# Altium PCB EDVDU_v2.PcbDoc
Units mil, origin at the board's own origin, x right, y up, seen from the top; angles counter-clockwise.
Board outline 6000 x 4000 mil, 2 copper layers (Top Layer, Bottom Layer); 86 components, 95 nets, 316 pads, 0 vias.
Unrouted connection lines stored in the file: 134.
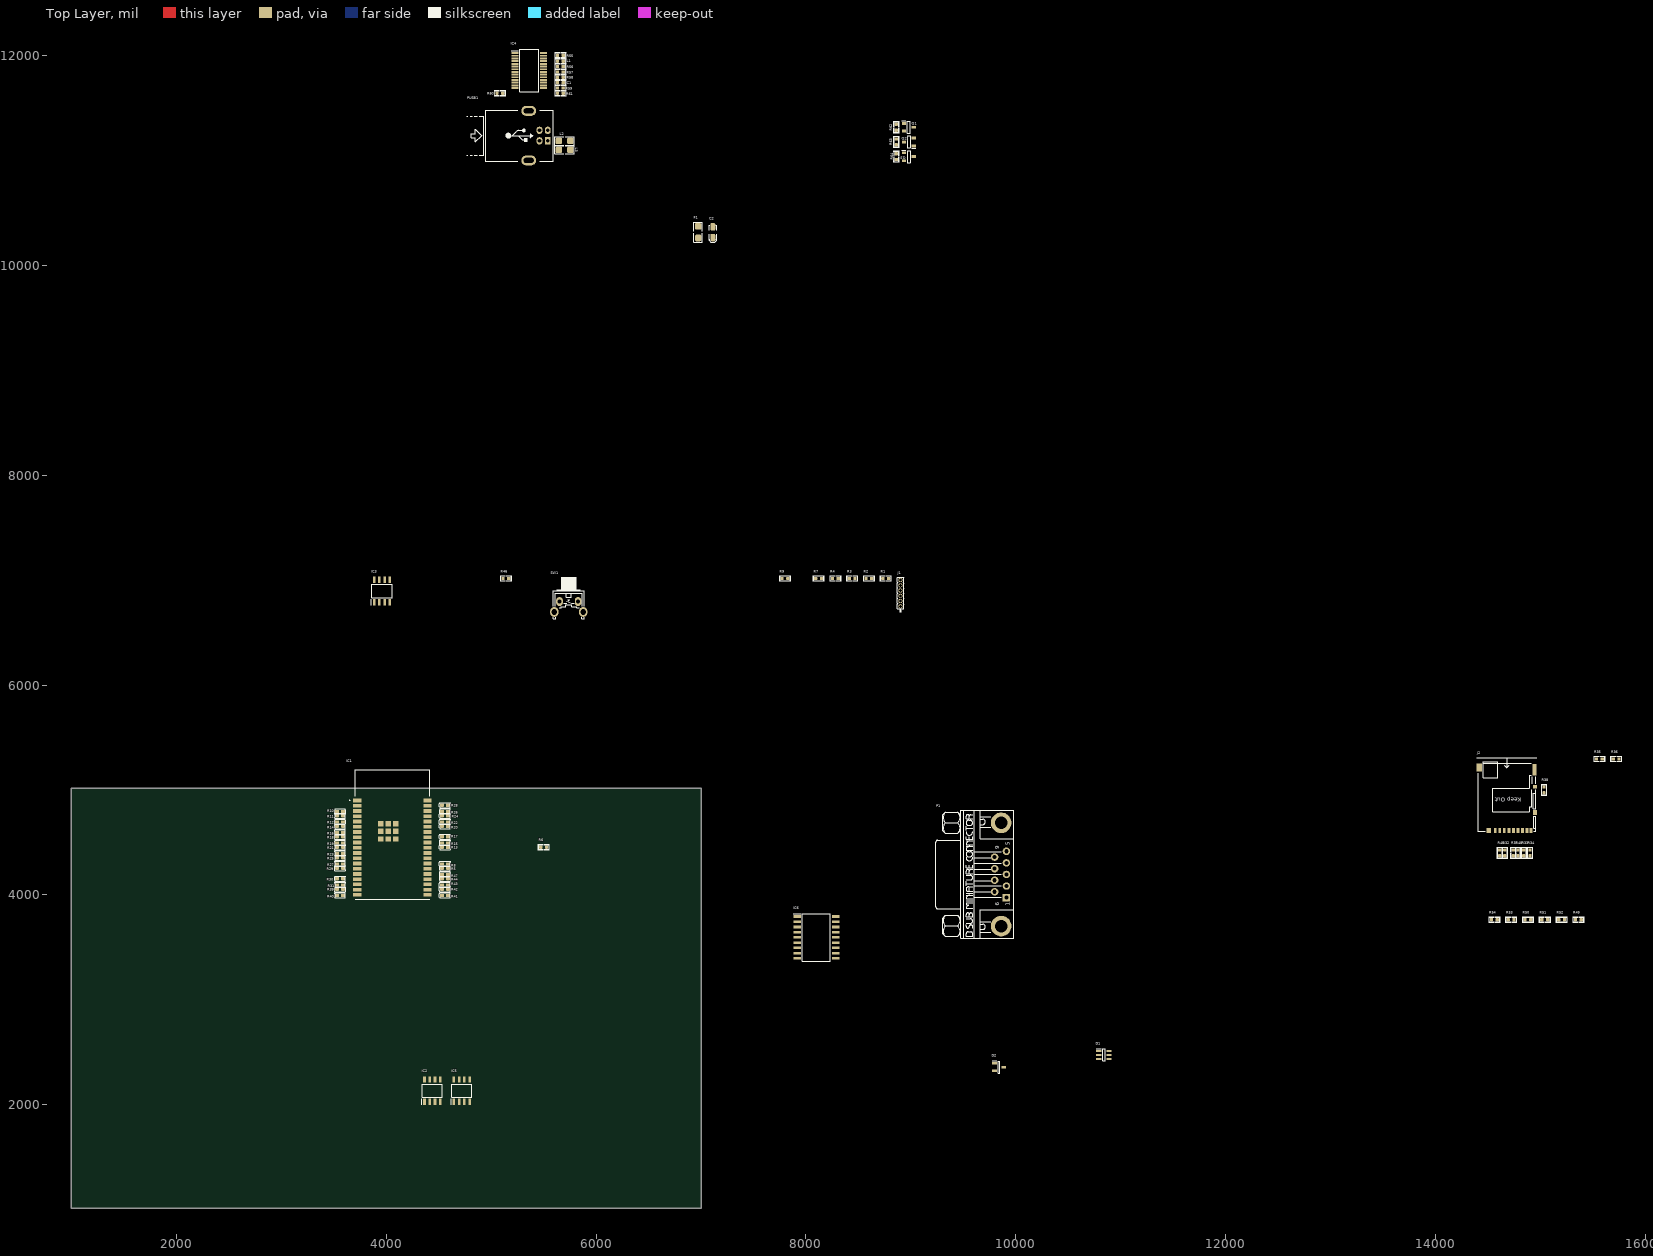
[diagram p0: Top Layer view]
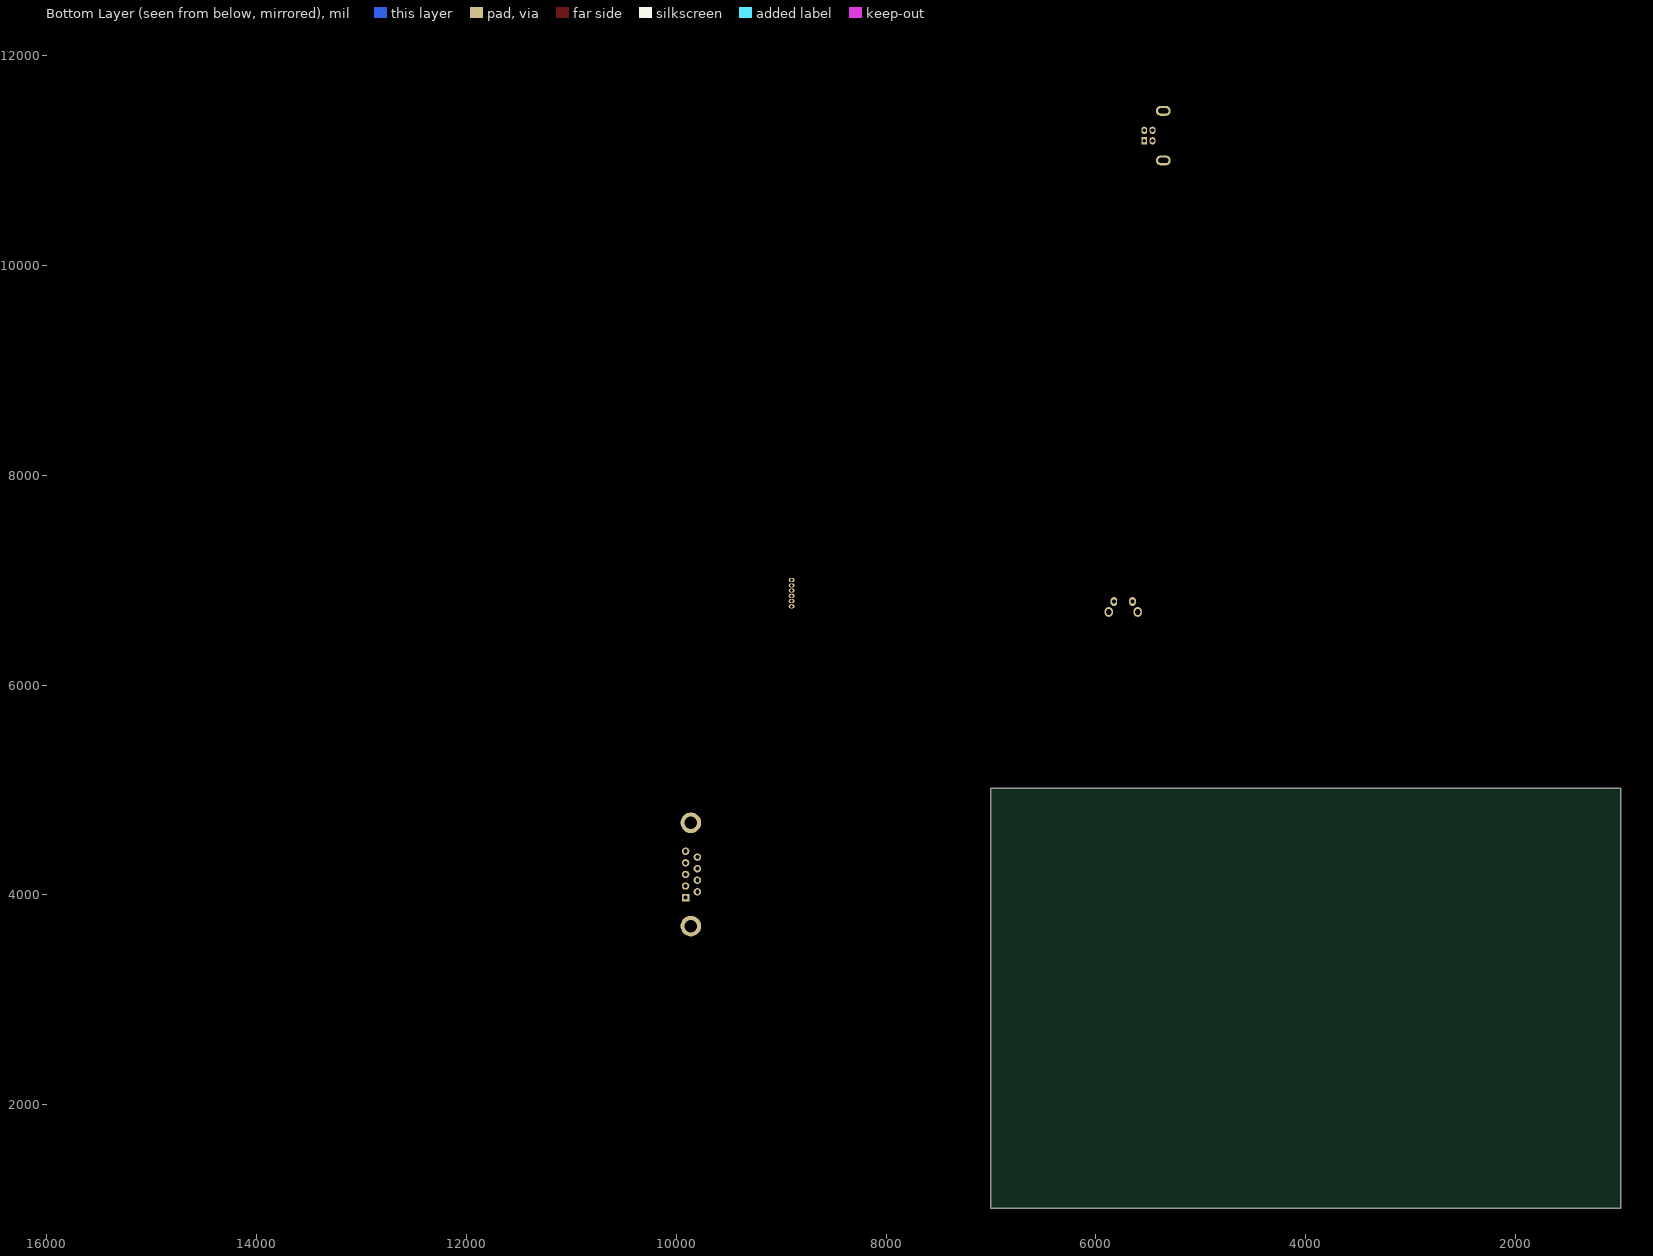
[diagram p1: Bottom Layer view, seen from below]

## Layer stack, top to bottom
Top Solder: solder mask 0.4, Solder Resist, Dk 3.5
Top Layer: signal copper 1.4
Dielectric 1: dielectric 12.6, FR-4, Dk 4.8
Bottom Layer: signal copper 1.4
Bottom Solder: solder mask 0.4, Solder Resist, Dk 3.5

## Board outline
1000,1015.16 7000,1015.16 7000,5015.16 1000,5015.16

## Design rules (kind name [scope] priority, off if disabled: settings)
Clearance [All] p1: gap=10 ignorepadtopadclearanceinfootprint=FALSE except(0: Arc-Hole Track-Hole SMDPad-Hole THPad-Hole Via-Hole Fill-Hole Poly-Hole Region-Hole Text-Hole)
DiffPairsRouting [All] p1: maxlimit=10 minlimit=10 mostfreqgap=10 toplayer_minwidth=15 toplayer_maxwidth=15 toplayer_prefwidth=15 bottomlayer_minwidth=15 bottomlayer_maxwidth=15 bottomlayer_prefwidth=15 maxuncoupledlength=500
PolygonConnect [All] p1: connectstyle=Relief reliefconductorwidth=10 reliefentries=4 polygonreliefangle="90 Angle" airgapwidth=10
RoomDefinition EDVDU_v2 [InComponentClass('EDVDU_v2')] p1: confinementstyle=ConfineOut formatcopy=TRUE lockcomponents=FALSE outline 7045,1075.16 7930,1075.16 7930,2465.16 7045,2465.16
RoutingVias [All] p1: holewidth=28 width=50 viastyle="Through Hole" minholewidth=28 minwidth=50 maxholewidth=28 maxwidth=50
SolderMaskExpansion [All] p1: expansion=4
Width [All] p1: maxlimit=10 minlimit=10 preferedwidth=10
29 further rules are at their usual default settings.

## Classes and differential pairs
differential pair FTDI_USB: +FTDI_USB_P -FTDI_USB_N

## Components (designator, comment, footprint, x,y, rotation, side; value= is the part's Value field where it differs from the comment)
C1 "100nF" C0603 5660.31,11740 r0 top
C2 "-uF" C_TN_3216 7112.44,10315.16 r90 top
D1 "PRTR5V0U4D,125" SOT95P275X110-6N 10840,2475.16 r0 top
D2 "BAT54A" SOT95P240X110-3N 9840,2360 r0 top
F1 "FUSE3A_1206" F1206 6972.44,10315.16 r90 top
IC1 "ESP32-WROVER-B_M213DH3264PH3Q0_" ESP32WROVERBM213DH3264PH3Q0 4060,4575.16 r0 top
IC2 "TJA1020T_CM,118" SOIC127P600X175-8N 4440,2135.16 r90 top
IC3 "TJA1050T_CM,118" SOIC127P600X175-8N 3960,6895.16 r90 top
IC4 "FT232RL" SOP65P778X200-28N 5363.15,11855.16 r0 top
IC5 "TJA1050T_CM,118" SOIC127P600X175-8N 4720,2135.16 r90 top
IC6 "MCP2515-I_SO" SOIC127P1030X265-18N 8100,3595.16 r0 top
J1 "JTAG" HDRMINI_M_1X6 8900,6875.16 r90 top value=HDRMINI_6
J2 "SDMICRO" SDMICRO_DM3AT 14680,4915.16 r0 top
L1 "10uH" L0603 5660.31,11944.72 r0 top
L2 "10uH" L1206 5700,11185.16 r0 top
L3 "10uH" L1206 5700,11100 r180 top
P1 "DSUB_9RF" DSUB_9RF 9860,4195.16 r90 top
PUSB1 "CONN_USB_B" USB_B_RA_THD 5500,11235.16 r90 top
Q1 "MMBT3904" SOT95P240X120-3N 8980,11315.16 r0 top
Q2 "MMBT3904" SOT95P240X120-3N 8980,11175.16 r180 top
Q3 "MMBT3904" SOT95P240X120-3N 8980,11035.16 r0 top
R1 "10K" R0603#1 8760,7015.16 r0 top
R2 "10K" R0603#1 8600,7015.16 r0 top
R3 "10K" R0603#1 8440,7015.16 r0 top
R4 "10K" R0603#1 8280,7015.16 r0 top
R5 "0R" R0603#2 4560,4255.16 r0 top
R6 "10K" R0603#1 5500,4455.16 r0 top
R7 "10K" R0603#1 8120,7015.16 r0 top
R8 "0R" R0603#2 4560,4295.16 r0 top
R9 "10K" R0603#1 7800,7015.16 r0 top
R10 "0R" R0603#2 3560,4795.16 r0 top
R11 "0R" R0603#2 3560,4755.16 r0 top
R12 "0R" R0603#2 3560,4695.16 r0 top
R13 "0R" R0603#2 4560,4455.16 r0 top
R14 "0R" R0603#2 3560,4655.16 r0 top
R15 "0R" R0603#2 4560,4495.16 r0 top
R16 "0R" R0603#2 3560,4595.16 r0 top
R17 "0R" R0603#2 4560,4555.16 r0 top
R18 "0R" R0603#2 3560,4555.16 r0 top
R19 "0R" R0603#2 3560,4495.16 r0 top
R20 "0R" R0603#2 4560,4655.16 r0 top
R21 "0R" R0603#2 3560,4455.16 r0 top
R22 "0R" R0603#2 4560,4695.16 r0 top
R23 "0R" R0603#2 3560,4395.16 r0 top
R24 "0R" R0603#2 4560,4755.16 r0 top
R25 "0R" R0603#2 3560,4355.16 r0 top
R26 "0R" R0603#2 4560,4795.16 r0 top
R27 "0R" R0603#2 3560,4295.16 r0 top
R28 "0R" R0603#2 4560,4855.16 r0 top
R29 "0R" R0603#2 3560,4255.16 r0 top
R30 "0R" R0603#2 3560,4155.16 r0 top
R31 "0R" R0603#2 3560,4095.16 r0 top
R32 "0R" R0603#1 14660,4400 r270 top
R33 "0R" R0603#1 14840,4400 r270 top
R34 "0R" R0603#1 14900,4400 r270 top
R35 "0R" R0603#1 15560,5295.16 r0 top
R36 "0R" R0603#1 15720,5295.16 r0 top
R37 "0R" R0603#1 14741.03,4400.35 r270 top
R38 "0R" R0603#1 15032.44,5000 r270 top
R39 "0R" R0603#2 3560,4055.16 r0 top
R40 "0R" R0603#2 3560,3995.16 r0 top
R41 "0R" R0603#2 4560,3995.16 r180 top
R42 "0R" R0603#2 4560,4055.16 r180 top
R43 "0R" R0603#2 4560,4095.16 r180 top
R44 "0R" R0603#2 4560,4155.16 r180 top
R45 "0R" R0603#1 14611.11,4400 r90 top
R46 "10K" R0603#1 5140,7015.16 r0 top
R47 "0R" R0603#2 4560,4195.16 r180 top
R48 "0R" R0603#1 14784.34,4400 r90 top
R49 "0R" R0603#1 15360,3764.25 r0 top
R50 "0R" R0603#1 14880,3764.25 r0 top
R51 "0R" R0603#1 15040,3764.25 r0 top
R52 "10K" R0603#1 15200,3764.25 r0 top
R53 "0R" R0603#1 14720,3764.25 r0 top
R54 "0R" R0603#1 14560,3764.25 r0 top
R55 "10K" R0603#1 5660.31,12000 r180 top
R56 "0R" R0603#1 5660.31,11893.54 r0 top
R57 "0R" R0603#1 5660.31,11842.36 r0 top
R58 "10K" R0603#1 5660.31,11791.18 r180 top
R59 "0R" R0603#1 5660.31,11688.82 r0 top
R60 "10K" R0603#1 5083.15,11640 r0 top
R61 "0R" R0603#1 5660.31,11640 r0 top
R62 "10K" R0603#1 8860,11315.16 r270 top
R63 "10K" R0603#1 8860,11175.16 r90 top
R64 "10K" R0603#1 8860,11035.16 r90 top
SW1 "PUSHBUTTON" SWPBT_SPST_R_6X6X6 5740,6795.16 r0 top

## Footprints (in the part's own frame and the unit in brackets; to place one, negate y for a bottom-side part, rotate by r counter-clockwise, add the part's x,y. Pads: shape width x height; smd on the part's side, far side on the other; paste and mask are expansions set on the pad)
C0603 [mm] "CHIP Capacitor, 1.6X0.8mm, 0603 OPTIMIZED"
  rrect50% 0.8x0.8 smd paste-5 mask+0.075: 1(-0.7,0) 2(0.7,0)
  Top Layer pour cut-out: -0.5,0.4 0.5,0.4 0.5,-0.4 -0.5,-0.4
  silkscreen extent -1.4,-0.7 1.4,0.7, body extent -0.8,-0.4 0.8,0.4, height 0.9
C_TN_3216 [mm] "CAPACITOR, TAN A, 1206P, 3.2x1.6mm"
  rrect50% 1.8x1.2 smd mask+0.075: 1(-1.3,0) 2(1.3,0)
  Top Layer pour cut-out: -0.762,0.9 0.762,0.9 0.762,-0.9 -0.762,-0.9
  silkscreen extent -2.4,-0.9 1.7,0.9, body extent -1.7,-0.9 1.7,0.9, height 1.7
DSUB_9RF [mm] "CONN, DSUB MINIATURE, 9PIN, R/A, FEMALE"
  rect 1.8x1.8 hole 1 mask+0.1: 1(-5.6,-1.27)
  round 1.8 hole 1 mask+0.1: 2(-2.8,-1.27) 3(0,-1.27) 4(2.8,-1.27) 5(5.6,-1.27) 6(-4.2,1.57) 7(-1.4,1.57) 8(1.4,1.57) 9(4.2,1.57)
  round 5 hole 3: MH1(-12.5,0) MH2(12.5,0)
  silkscreen extent -15.5,-3 15.5,15.8, body extent -15.4,-2.9 15.4,15.6, height 12.8
ESP32WROVERBM213DH3264PH3Q0 [mm]
  rect 2x0.9 smd: 1(-8.5,8.26) 2(-8.5,6.99) 3(-8.5,5.72) 4(-8.5,4.45) 5(-8.5,3.18) 6(-8.5,1.91) 7(-8.5,0.64) 8(-8.5,-0.63) 9(-8.5,-1.9) 10(-8.5,-3.17) 11(-8.5,-4.44) 12(-8.5,-5.71) 13(-8.5,-6.98) 14(-8.5,-8.25) 15(-8.5,-9.52) 16(-8.5,-10.79) 17(-8.5,-12.06) 18(-8.5,-13.33) 19(-8.5,-14.6) 20(8.5,-14.6) 21(8.5,-13.33) 22(8.5,-12.06) 23(8.5,-10.79) 24(8.5,-9.52) 25(8.5,-8.25) 26(8.5,-6.98) 27(8.5,-5.71) 28(8.5,-4.44) 29(8.5,-3.17) 30(8.5,-1.9) 31(8.5,-0.63) 32(8.5,0.64) 33(8.5,1.91) 34(8.5,3.18) 35(8.5,4.45) 36(8.5,5.72) 37(8.5,6.99) 38(8.5,8.26)
  rect 1.33x1.33 smd: 39(-2.835,2.595) 40(-2.835,0.76) 41(-2.835,-1.075) 42(-1,-1.075) 43(0.835,-1.075) 44(0.835,0.76) 45(0.835,2.595) 46(-1,2.595) 47(-1,0.76)
  silkscreen extent -10.4,-15.7 9,15.7, body extent -9,-15.7 9,15.7, height 3.5
F1206 [mm]
  rrect50% 1.6x1.6 smd paste-2 mask+0.075: 1(-1.4,0) 2(1.4,0)
  Top Layer pour cut-out: -0.8,1 -0.8,-1 0.8,-1 0.8,1
  silkscreen extent -2.4,-1 2.4,1, body extent -1.6,-0.8 1.6,0.8, height 1
HDRMINI_M_1X6 [mm] "mini header (50mil pitch)"
  round 1 / inner round 1 / far side oval 1x1.4 hole 0.7 mask+0.05: 1(-3.175,0) 2(-1.905,0) 3(-0.635,0) 4(0.635,0) 5(1.905,0) 6(3.175,0)
  silkscreen extent -4.52,-0.8 3.81,0.8, body extent -3.81,-0.64 3.81,0.64, height 7.3
L0603 [mm] "INDUCTOR, FERRITE BEAD, 0603, 1.6X0.8mm"
  rrect50% 0.8x0.8 smd paste-5 mask+0.075: 1(-0.7,0) 2(0.7,0)
  silkscreen extent -1.4,-0.7 1.4,0.7, body extent -0.8,-0.4 0.8,0.4, height 0.95
L1206 [mm] "INDUCTOR, FERRITE BEAD, 1206, 3.2X1.6mm"
  rrect50% 1.6x1.6 smd paste-5 mask+0.075: 1(-1.4,0) 2(1.4,0)
  Top Layer pour cut-out: -0.8,1 -0.8,-1 0.8,-1 0.8,1
  silkscreen extent -2.4,-1 2.4,1, body extent -1.6,-0.8 1.6,0.8, height 1.1
R0603#1 [mm] "CHIP Resistor 1/10 WATT, 1.6x0.8mm, 0603, OPTIMIZED"
  rrect50% 0.8x0.8 smd paste-5 mask+0.075: 1(-0.7,0) 2(0.7,0)
  Top Layer pour cut-out: -0.5,0.4 0.5,0.4 0.5,-0.4 -0.5,-0.4
  silkscreen extent -1.4,-0.7 1.4,0.7, body extent -0.85,-0.4 0.85,0.4, height 0.56
R0603#2 [mm]
  rrect50% 1x0.8 smd mask+0.05: 1(-0.7,0) 2(0.7,0)
  silkscreen extent -1.32,-0.6 1.32,0.6, body extent -0.85,-0.4 0.85,0.4, height 0.56
SDMICRO_DM3AT [mm]
  rect 0.7x1.2 smd: 1(-2.85,-7.6) 2(-1.75,-7.6) 3(-0.65,-7.6) 4(0.45,-7.6) 5(1.55,-7.6) 6(2.65,-7.6) 7(3.75,-7.6)
  rect 0.7x1.2 smd mask+0.07: 8(4.85,-7.6) 9(5.8,-7.6)
  rect 1x1.2 smd: 10(6.75,-3.25) 14(-4.4,-7.6)
  rect 1x0.8 smd: 11(6.75,2.95)
  rect 1x2.8 smd: 12(6.7,7.1)
  rect 1.3x1.9 smd: 13(-6.7,7.6)
  silkscreen extent -7.29,-7.78 7.18,9.94, body extent -7,-7.65 6.85,8.5, height 1.68
SOIC127P600X175-8N [mm]
  rect 1.525x0.65 smd: 1(-2.712,1.905) 2(-2.712,0.635) 3(-2.712,-0.635) 4(-2.712,-1.905) 5(2.712,-1.905) 6(2.712,-0.635) 7(2.712,0.635) 8(2.712,1.905)
  silkscreen extent -3.47,-2.45 1.6,2.58, body extent -3,-2.45 3,2.45, height 1.75
SOIC127P1030X265-18N [mm]
  rect 1.85x0.65 smd: 1(-4.675,5.08) 2(-4.675,3.81) 3(-4.675,2.54) 4(-4.675,1.27) 5(-4.675,0) 6(-4.675,-1.27) 7(-4.675,-2.54) 8(-4.675,-3.81) 9(-4.675,-5.08) 10(4.675,-5.08) 11(4.675,-3.81) 12(4.675,-2.54) 13(4.675,-1.27) 14(4.675,0) 15(4.675,1.27) 16(4.675,2.54) 17(4.675,3.81) 18(4.675,5.08)
  silkscreen extent -5.6,-5.77 3.4,5.77, body extent -5.15,-5.77 5.15,5.77, height 2.65
SOP65P778X200-28N [mm]
  rect 1.7x0.45 smd: 1(-3.5,4.225) 2(-3.5,3.575) 3(-3.5,2.925) 4(-3.5,2.275) 5(-3.5,1.625) 6(-3.5,0.975) 7(-3.5,0.325) 8(-3.5,-0.325) 9(-3.5,-0.975) 10(-3.5,-1.625) 11(-3.5,-2.275) 12(-3.5,-2.925) 13(-3.5,-3.575) 14(-3.5,-4.225) 15(3.5,-4.225) 16(3.5,-3.575) 17(3.5,-2.925) 18(3.5,-2.275) 19(3.5,-1.625) 20(3.5,-0.975) 21(3.5,-0.325) 22(3.5,0.325) 23(3.5,0.975) 24(3.5,1.625) 25(3.5,2.275) 26(3.5,2.925) 27(3.5,3.575) 28(3.5,4.225)
  silkscreen extent -4.35,-5.14 2.3,5.14, body extent -3.89,-5.14 3.89,5.14, height 2
SOT95P240X110-3N [mm]
  rect 1.1x0.6 smd: 1(-1.1,0.95) 2(-1.1,-0.95) 3(1.1,0)
  silkscreen extent -1.65,-1.45 0.2,1.5, body extent -1.2,-1.45 1.2,1.45, height 1.1
SOT95P240X120-3N [mm]
  rect 1x0.7 smd: 1(-1.2,0.95) 2(-1.2,-0.95) 3(1.2,0)
  silkscreen extent -1.7,-1.46 0.35,1.55, body extent -1.2,-1.46 1.2,1.46, height 1.2
SOT95P275X110-6N [mm]
  rect 1.25x0.5 smd: 1(-1.25,0.95) 2(-1.25,0) 3(-1.25,-0.95) 4(1.25,-0.95) 5(1.25,0) 6(1.25,0.95)
  silkscreen extent -1.88,-1.45 0.28,1.55, body extent -1.37,-1.47 1.38,1.48, height 1.01
SWPBT_SPST_R_6X6X6 [mm] "SWITCH, PUSHBUTTON, THD, SPST, 6X6X5.85mm; 1,000,000 cycles ; 0.98N Force, SKHHLUA010"
  oval 1.6x2.2 hole 1 mask+0.1: 1(-2.25,0) 2(2.25,0)
  oval 2x2.4 hole 1.4 mask+0.1: MH1(-3.5,-2.5) MH2(3.5,-2.5)
  silkscreen extent -3.8,-4.1 3.8,5.84, body extent -4.25,-4.04 4.25,5.86, height 7.43
USB_B_RA_THD [mm] "CONN, USB B, Receptacle, RIGHT ANGLE, THD"
  rect 1.8x1.4 hole 0.9: 1(-1.27,-1)
  oval 1.8x1.4 hole 0.9: 2(1.27,-1) 3(1.27,1) 4(-1.27,1)
  oval 2.4x3.6 hole 1.2 slot 2.4 at 90 deg: SH1(-6,3.6) SH2(6,3.6)
  silkscreen extent -6.2,-2.3 6.2,18.57, body extent -7.45,-2.52 7.34,13.98, height 11.1

## Part data
C1: library part CAP_SMD_MLCC, "CAP, SMD, MLCC", ASSEMBLY=ASSEMBLY, DESC="CAP, MLCC, 1nF, 50V, C0G, 10%, 0402", MANF=Murata, MANF_P#=MANF_PART#, PARAM=50V, PARAM2="C0G, 10%", PRICE="100= 1$"
C2: library part CAP_SMD_TAN, "CAP, SMD, TAN,", =http://www.chila.ir, PARAM2=-V
D1: "Diode", Manufacturer_Name=Nexperia, Mouser Part Number=771-PRTR5V0U4D-T/R, Arrow Part Number=PRTR5V0U4D,125, Arrow Price/Stock=https://www.arrow.com/en/products/prtr5v0u4d125/nexperia?region=europe, Datasheet Link=https://assets.nexperia.com/documents/data-sheet/PRTR5V0U4D.pdf, Height=1.1mm, Manufacturer_Part_Number=PRTR5V0U4D,125, Mouser Price/Stock=https://www.mouser.co.uk/ProductDetail/Nexperia/PRTR5V0U4D125?qs=LOCUfHb8d9tF9D2ouM%2FWyA%3D%3D, Ordered By=SpaceOmid
D2: "Schottky Diode", Manufacturer_Name=Rectron, Mouser Part Number=583-BAT54A, Arrow Part Number=BAT54A, Arrow Price/Stock=https://www.arrow.com/en/products/bat54a/rectron?region=nac, Datasheet Link=http://www.rectron.com/data_sheets/bat54a.pdf, Height=1.1mm, Manufacturer_Part_Number=BAT54A, Mouser Price/Stock=https://www.mouser.co.uk/ProductDetail/Rectron/BAT54A?qs=7pEAo90IqNGfs7SPP1chMg%3D%3D, Ordered By=SpaceOmid
F1: library part FUSE_3A_1206_SLOW, "Fuse, 3A, 32VDC, 1206, SMD, Slow Blow", =http://www.chila.ir, MANF=Bourns, MANF_P#=SF-1206SP300-2, Ordered By=SpaceOmid, PARAM="3A; 32VDC; Slow Blow", PARAM2=0.027Ohm, PRICE=0.9$
IC1: "Integrated Circuit", Manufacturer_Name="Espressif Systems", Manufacturer_Part_Number=ESP32-WROVER-B(M213DH3264PH3Q0), Mouser Part Number=356-ESP32-WROVER-B, Datasheet Link=https://www.mouser.com/datasheet/2/891/esp32-wrover-b_datasheet_en-1384674.pdf, Height=3.4mm, Mouser Price/Stock=https://www.mouser.co.uk/ProductDetail/Espressif-Systems/ESP32-WROVER-BM213DH3264PH3Q0?qs=W%2FMpXkg%252BdQ7xuL5m37Yhrg%3D%3D
IC2: "Integrated Circuit", Arrow Part Number=TJA1020T/CM,118, Manufacturer_Name=NXP, Mouser Part Number=771-TJA1020T/CM118, Arrow Price/Stock=https://www.arrow.com/en/products/tja1020tcm118/nxp-semiconductors?region=nac, Datasheet Link=http://www.nxp.com/docs/en/data-sheet/TJA1020.pdf, Height=1.75mm, Manufacturer_Part_Number=TJA1020T/CM,118, Mouser Price/Stock=https://www.mouser.co.uk/ProductDetail/NXP-Semiconductors/TJA1020T-CM118?qs=cbprxTG2Yq%252B9fBsR3gYBWA%3D%3D
IC3 IC5: "Integrated Circuit", Arrow Part Number=TJA1050T/CM,118, Manufacturer_Name=NXP, Mouser Part Number=771-TJA1050T/CM118, Arrow Price/Stock=https://www.arrow.com/en/products/tja1050tcm118/nxp-semiconductors?region=nac, Datasheet Link=http://www.nxp.com/docs/en/data-sheet/TJA1050.pdf, Height=1.75mm, Manufacturer_Part_Number=TJA1050T/CM,118, Mouser Price/Stock=https://www.mouser.co.uk/ProductDetail/NXP-Semiconductors/TJA1050T-CM118?qs=5XOdhvmYM0NFFspw0VP5sA%3D%3D
IC4: "Integrated Circuit", Manufacturer_Name="FTDI Chip", Arrow Part Number=FT232RL, Arrow Price/Stock=https://www.arrow.com/en/products/ft232rl/ftdi-chip?region=nac, Datasheet Link=http://www.ftdichip.com/Support/Documents/DataSheets/ICs/DS_FT232R.pdf, Height=2mm, Manufacturer_Part_Number=FT232RL
IC6: "Integrated Circuit", Arrow Part Number=MCP2515-I/SO, Manufacturer_Name=Microchip, Mouser Part Number=579-MCP2515-I/SO, Arrow Price/Stock=https://www.arrow.com/en/products/mcp2515-iso/microchip-technology?region=nac, Datasheet Link=https://datasheet.datasheetarchive.com/originals/distributors/Datasheets-34/DSA-675138.pdf, Height=2.65mm, Manufacturer_Part_Number=MCP2515-I/SO, Mouser Price/Stock=https://www.mouser.co.uk/ProductDetail/Microchip-Technology/MCP2515-I-SO?qs=KwArPi4cUogGDbGnphOvtQ%3D%3D
J1: library part HDRMINI_M_1X6, "CONN, HEADER, Male, pitch: 1.27mm, 6POS", =http://www.chila.ir
J2: library part SOCKET_SDMICRO_DM3AT, "CONN MICRO SD R/A PUSH-PUSH SMD", MANF=Hirose, MANF_P#=DM3AT-SF-PEJM5, Ordered By=SpaceOmid, PRICE=2.6$
L1 L2 L3: library part IND_SMD, "IND, SMD"
P1: library part CONN_DSUB_9RF, "CONN, DSUB, HD, 9PIN, R/A, FEMALE, THD", =http://www.chila.ir, MANF=-, MANF_P#=-
PUSB1: library part CONN_USB_B_RA_THD, "CONN, USB, B, R/A, THD", =http://www.chila.ir, MANF="TE Connectivity", MANF_P#=292304-1
Q1 Q2 Q3: "Transistor BJT NPN", Manufacturer_Name=onsemi, Mouser Part Number=512-MMBT3904, Arrow Part Number=MMBT3904, Arrow Price/Stock=https://www.arrow.com/en/products/mmbt3904/on-semiconductor, Datasheet Link=https://media.digikey.com/pdf/Data%20Sheets/ON%20Semiconductor%20PDFs/2N3904,MMBT3904,PZT3904.pdf, Height=1.2mm, Manufacturer_Part_Number=MMBT3904, Mouser Price/Stock=https://www.mouser.co.uk/ProductDetail/ON-Semiconductor-Fairchild/MMBT3904?qs=UMEuL5FsraCg3xKjS4uBJQ%3D%3D, Ordered By=SpaceOmid
R1 R2 R3 R4 R5 R6 R7 R8 R9 R10 R11 R12 R13 R14 R15 R16 R17 R18 R19 R20 R21 R22 R23 R24 R25 R26 R27 R28 R29 R30 R31 R32 R33 R34 R35 R36 R37 R38 R39 R40 R41 R42 R43 R44 R45 R46 R47 R48 R49 R50 R51 R52 R53 R54 R55 R56 R57 R58 R59 R60 R61 R62 R63 R64: library part RES_SMD, "RES, SMD", ASSEMBLY=ASSEMBLY, DESC=DESCRIPTION, DIST#=MOUSER, MANF="KOA SPEER", MANF_P#=RK73H1ETTP4701F, PARAM=0.063W, PARAM2=1%, PRICE="100= 0.5$"
SW1: library part SWPBT_SPST_R_6X6X6_SKHHLUA010, "SWITCH, PUSH BUTTON, TACTILE, THD, SPST, 6X6X6mm RIGHT", ASSEMBLY=ASSEMBLY, DESC=DESCRIPTION, MANF=ALPS, MANF_P#=SKHHLUA010, PARAM=PARAM, PRICE=PRICE

## Nets (pads, with @x,y where several pads share a name; then routed paths per layer and width w, separated by ;. In a path a pad name is that pad's centre, name@x,y a point inside that pad or via, vN(x,y) a via of type N, cw(c..) or ccw(c..) an arc to the next point about the centre after c; other vN are vias at no path point)
EARTH: J2.10 J2.12 J2.13 J2.14 PUSB1.SH1 PUSB1.SH2
ESP_EN: J1.6 Q1.3 R7.1 R9.1 R10.1
ESP_RXD0: R22.2
ESP_SD_CLK: R41.1
ESP_SD_CMD: R40.1
ESP_SD_SD0: R42.1
ESP_SD_SD1: R43.1
ESP_SD_SD2: R31.1
ESP_SD_SD3: R39.1
ESP_SENS_VN: R12.1
ESP_SENS_VP: R11.1
ESP_TXD0: R24.2
FTDI_DTR: IC4.2 Q2.2 Q3.2 R62.2
FTDI_OSCI: IC4.27
FTDI_OSCO: IC4.28
FTDI_PWREN: IC4.14 R60.2
FTDI_RESET: IC4.19 R58.2
FTDI_RTS: IC4.3 Q1.2 R63.2 R64.2
FTDI_TEST: IC4.26 R55.2
FTDI_TXDEN: IC4.13
FTDI_USB_N: PUSB1.2 R59.2
FTDI_USB_P: PUSB1.3 R61.2
GND: C1.2 IC1.1 IC1.15 IC1.38 IC1.39 IC1.40 IC1.41 IC1.42 IC1.43 IC1.44 IC1.45 IC1.46 IC1.47 IC4.18 IC4.21 J1.1 J2.9 L1.2 L3.1 R1.2 R46.2 R55.1
GPIO00: Q2.3 R5.2 R6.1
GPIO02: Q3.3 R46.1 R47.1 R48.1
GPIO04: R8.2 R49.1
GPIO05: R13.2
GPIO12: J1.3 R2.1 R29.1 R50.1
GPIO13: J1.2 R1.1 R30.1 R53.1
GPIO14: J1.5 R4.1 R27.1 R54.1
GPIO15: J1.4 R3.1 R44.1 R45.1
GPIO18: R15.2
GPIO19: R17.2
GPIO21: R20.2 R51.2 R52.1
GPIO22: R26.2
GPIO23: IC1.32 R28.2
GPIO25: R21.1
GPIO26: R23.1
GPIO27: R25.1
GPIO32: R18.1
GPIO33: R19.1
GPIO34: R14.1
GPIO35: R16.1
NetC1_1: C1.1 IC4.17
NetIC1_3: IC1.3 R10.2
NetIC1_4: IC1.4 R11.2
NetIC1_5: IC1.5 R12.2
NetIC1_6: IC1.6 R14.2
NetIC1_7: IC1.7 R16.2
NetIC1_8: IC1.8 R18.2
NetIC1_9: IC1.9 R19.2
NetIC1_10: IC1.10 R21.2
NetIC1_11: IC1.11 R23.2
NetIC1_12: IC1.12 R25.2
NetIC1_13: IC1.13 R27.2
NetIC1_14: IC1.14 R29.2
NetIC1_16: IC1.16 R30.2
NetIC1_17: IC1.17 R31.2
NetIC1_18: IC1.18 R39.2
NetIC1_19: IC1.19 R40.2
NetIC1_20: IC1.20 R41.2
NetIC1_21: IC1.21 R42.2
NetIC1_22: IC1.22 R43.2
NetIC1_23: IC1.23 R44.2
NetIC1_24: IC1.24 R47.2
NetIC1_25: IC1.25 R5.1
NetIC1_26: IC1.26 R8.1
NetIC1_29: IC1.29 R13.1
NetIC1_30: IC1.30 R15.1
NetIC1_31: IC1.31 R17.1
NetIC1_33: IC1.33 R20.1
NetIC1_34: IC1.34 R22.1
NetIC1_35: IC1.35 R24.1
NetIC1_36: IC1.36 R26.1
NetIC1_37: IC1.37 R28.1
NetIC4_15: IC4.15 R61.1
NetIC4_16: IC4.16 R59.1
NetIC4_22: IC4.22 R57.1
NetIC4_23: IC4.23 R56.1
NetIC4_25: IC4.25 L1.1
NetJ2_1: J2.1 R35.1 R50.2
NetJ2_2: J2.2 R36.1 R53.2
NetJ2_3: J2.3 R32.1 R45.2
NetJ2_5: J2.5 R37.1 R54.2
NetJ2_7: J2.7 R33.1 R48.2
NetJ2_8: J2.8 R34.1 R49.2
NetJ2_11: J2.11 R38.1 R51.1
NetL2_1: L2.1 PUSB1.1
NetL3_2: L3.2 PUSB1.4
NetQ1_1: Q1.1 R62.1
NetQ2_1: Q2.1 R63.1
NetQ3_1: Q3.1 R64.1
VBUS: L2.2
VCC: IC4.20 R58.1 R60.1
VDD: IC1.2 R2.2 R3.2 R4.2 R6.2 R7.2 R9.2 R32.2 R33.2 R34.2 R35.2 R36.2 R37.2 R38.2 R52.2
pads on no net: C2.1 C2.2 D1.1 D1.2 D1.3 D1.4 D1.5 D1.6 D2.1 D2.2 D2.3 F1.1 F1.2 IC1.27 IC1.28 IC2.1 IC2.2 IC2.3 IC2.4 IC2.5 IC2.6 IC2.7 IC2.8 IC3.1 IC3.2 IC3.3 IC3.4 IC3.5 IC3.6 IC3.7 IC3.8 IC4.1 IC4.4 IC4.5 IC4.6 IC4.7 IC4.8 IC4.9 IC4.10 IC4.11 IC4.12 IC4.24 IC5.1 IC5.2 IC5.3 IC5.4 IC5.5 IC5.6 IC5.7 IC5.8 IC6.1 IC6.2 IC6.3 IC6.4 IC6.5 IC6.6 IC6.7 IC6.8 IC6.9 IC6.10 IC6.11 IC6.12 IC6.13 IC6.14 IC6.15 IC6.16 IC6.17 IC6.18 J2.4 J2.6 P1.1 P1.2 P1.3 P1.4 P1.5 P1.6 P1.7 P1.8 P1.9 P1.MH1 P1.MH2 R56.2 R57.2 SW1.1 SW1.2 SW1.MH1 SW1.MH2

## Text inside footprints (layer, text, board x,y; h text height)
J2: Top Overlay "Keep Out" at 14815,4925.16 h39.37 r180
P1: Top Overlay "6" at 9840,3895.57 h39.37 r90; Top Overlay "1" at 9940,3895.57 h39.37 r90; Top Overlay "5" at 9940,4475.57 h39.37 r90; Top Overlay "9" at 9840,4435.57 h39.37 r90
PUSB1: Mechanical 1 "Edge of Board" at 4917.32,10975.31 h39.37 r90